# Altium PCB PCB_Advanced_H_Bridge.PcbDoc
Units mm, origin at the board's own origin, x right, y up, seen from the top; angles counter-clockwise.
Board outline 50 x 50 mm, 4 copper layers (Top Layer, Internal Plane 1, Internal Plane 2, Bottom Layer); 34 components, 30 nets, 166 pads, 90 vias.
Unrouted connection lines stored in the file: 1.
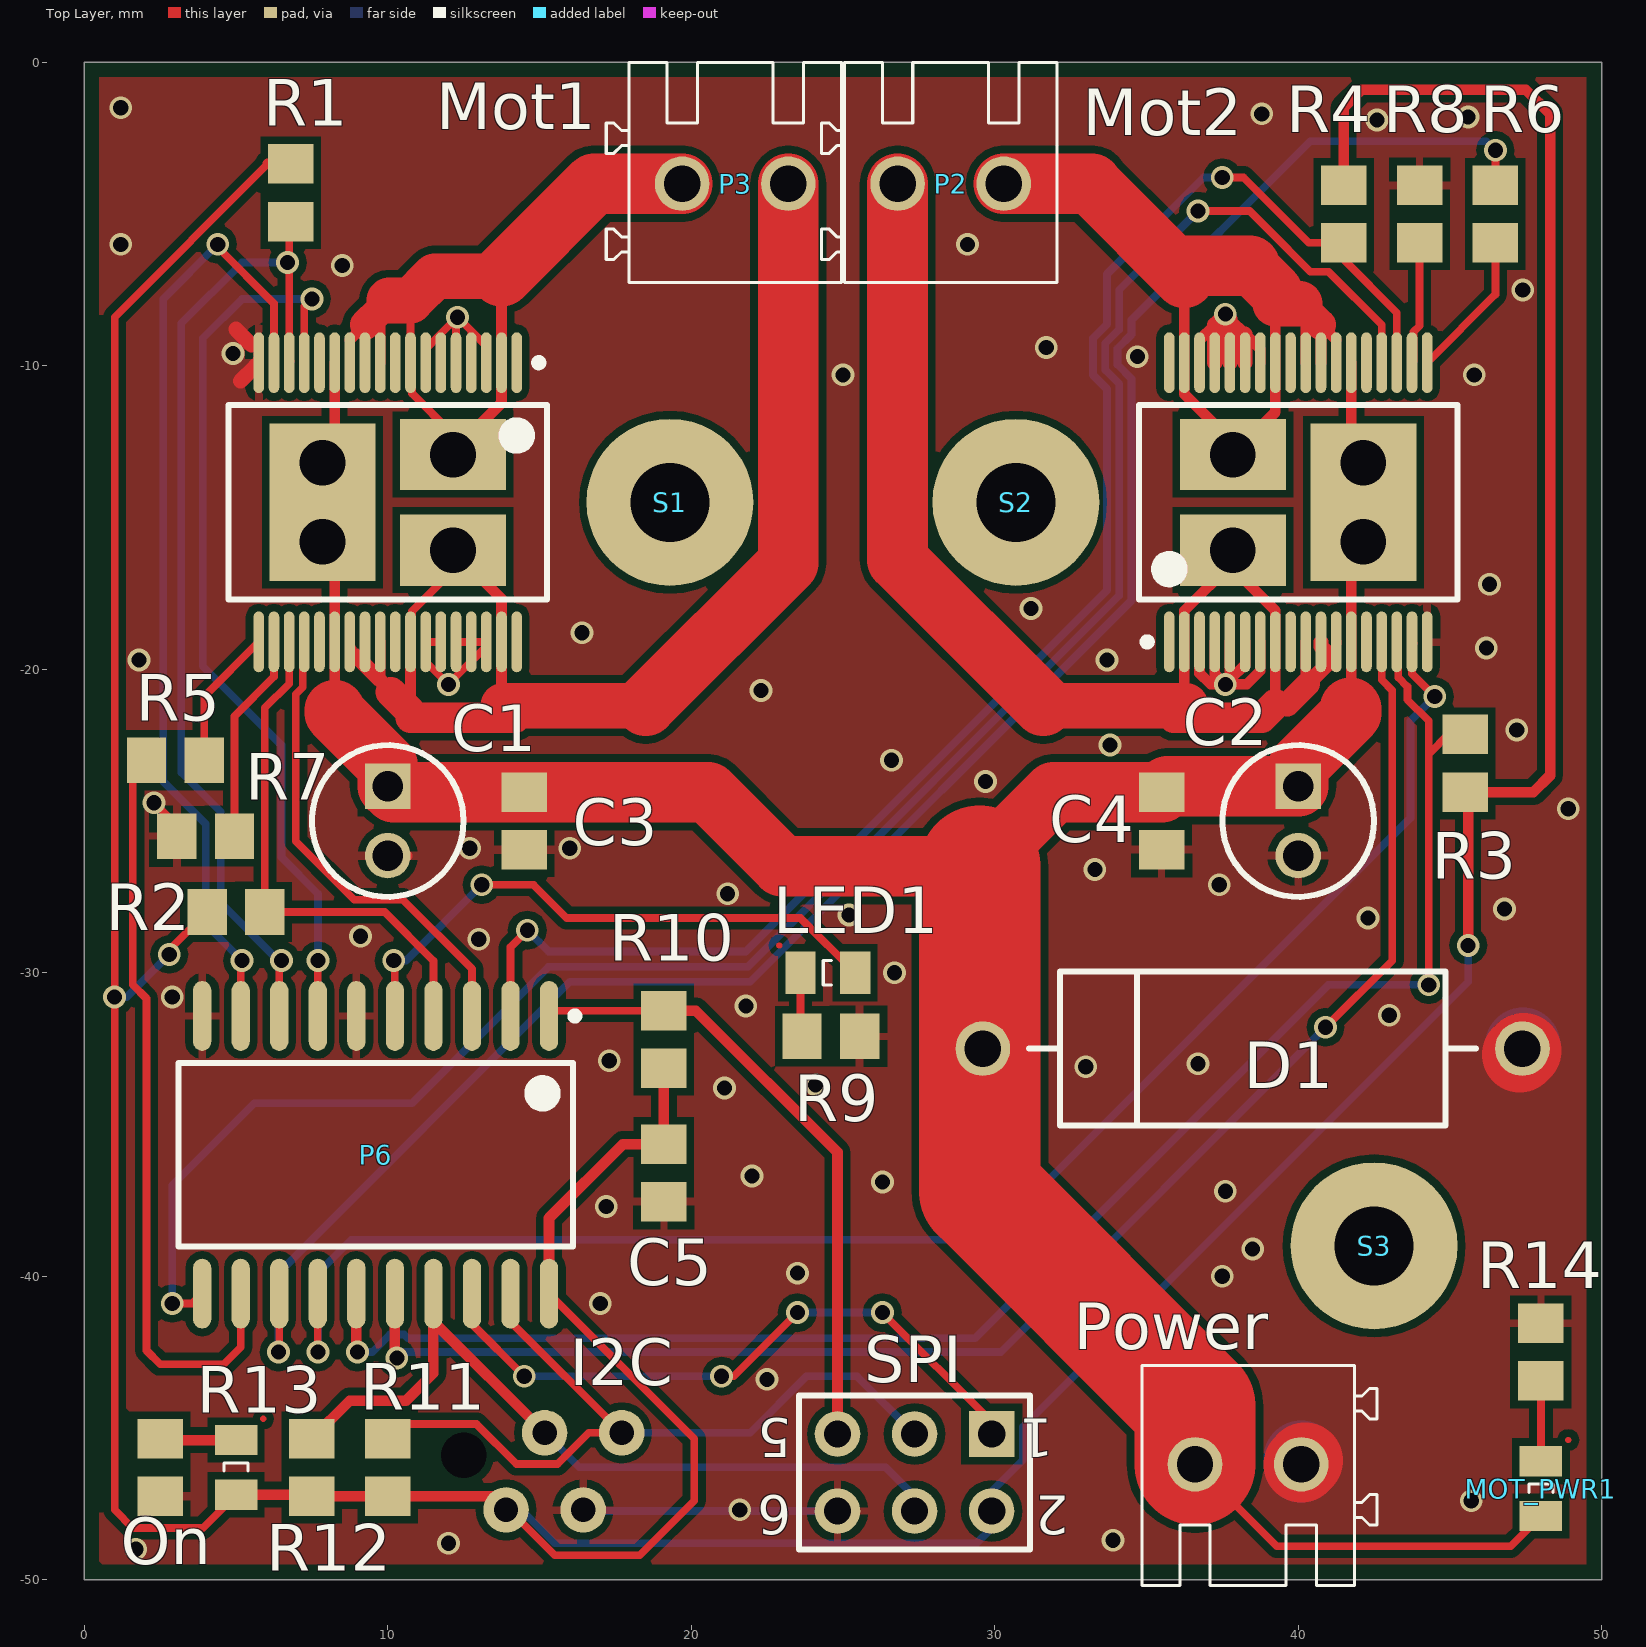
[diagram p0: Top Layer view]
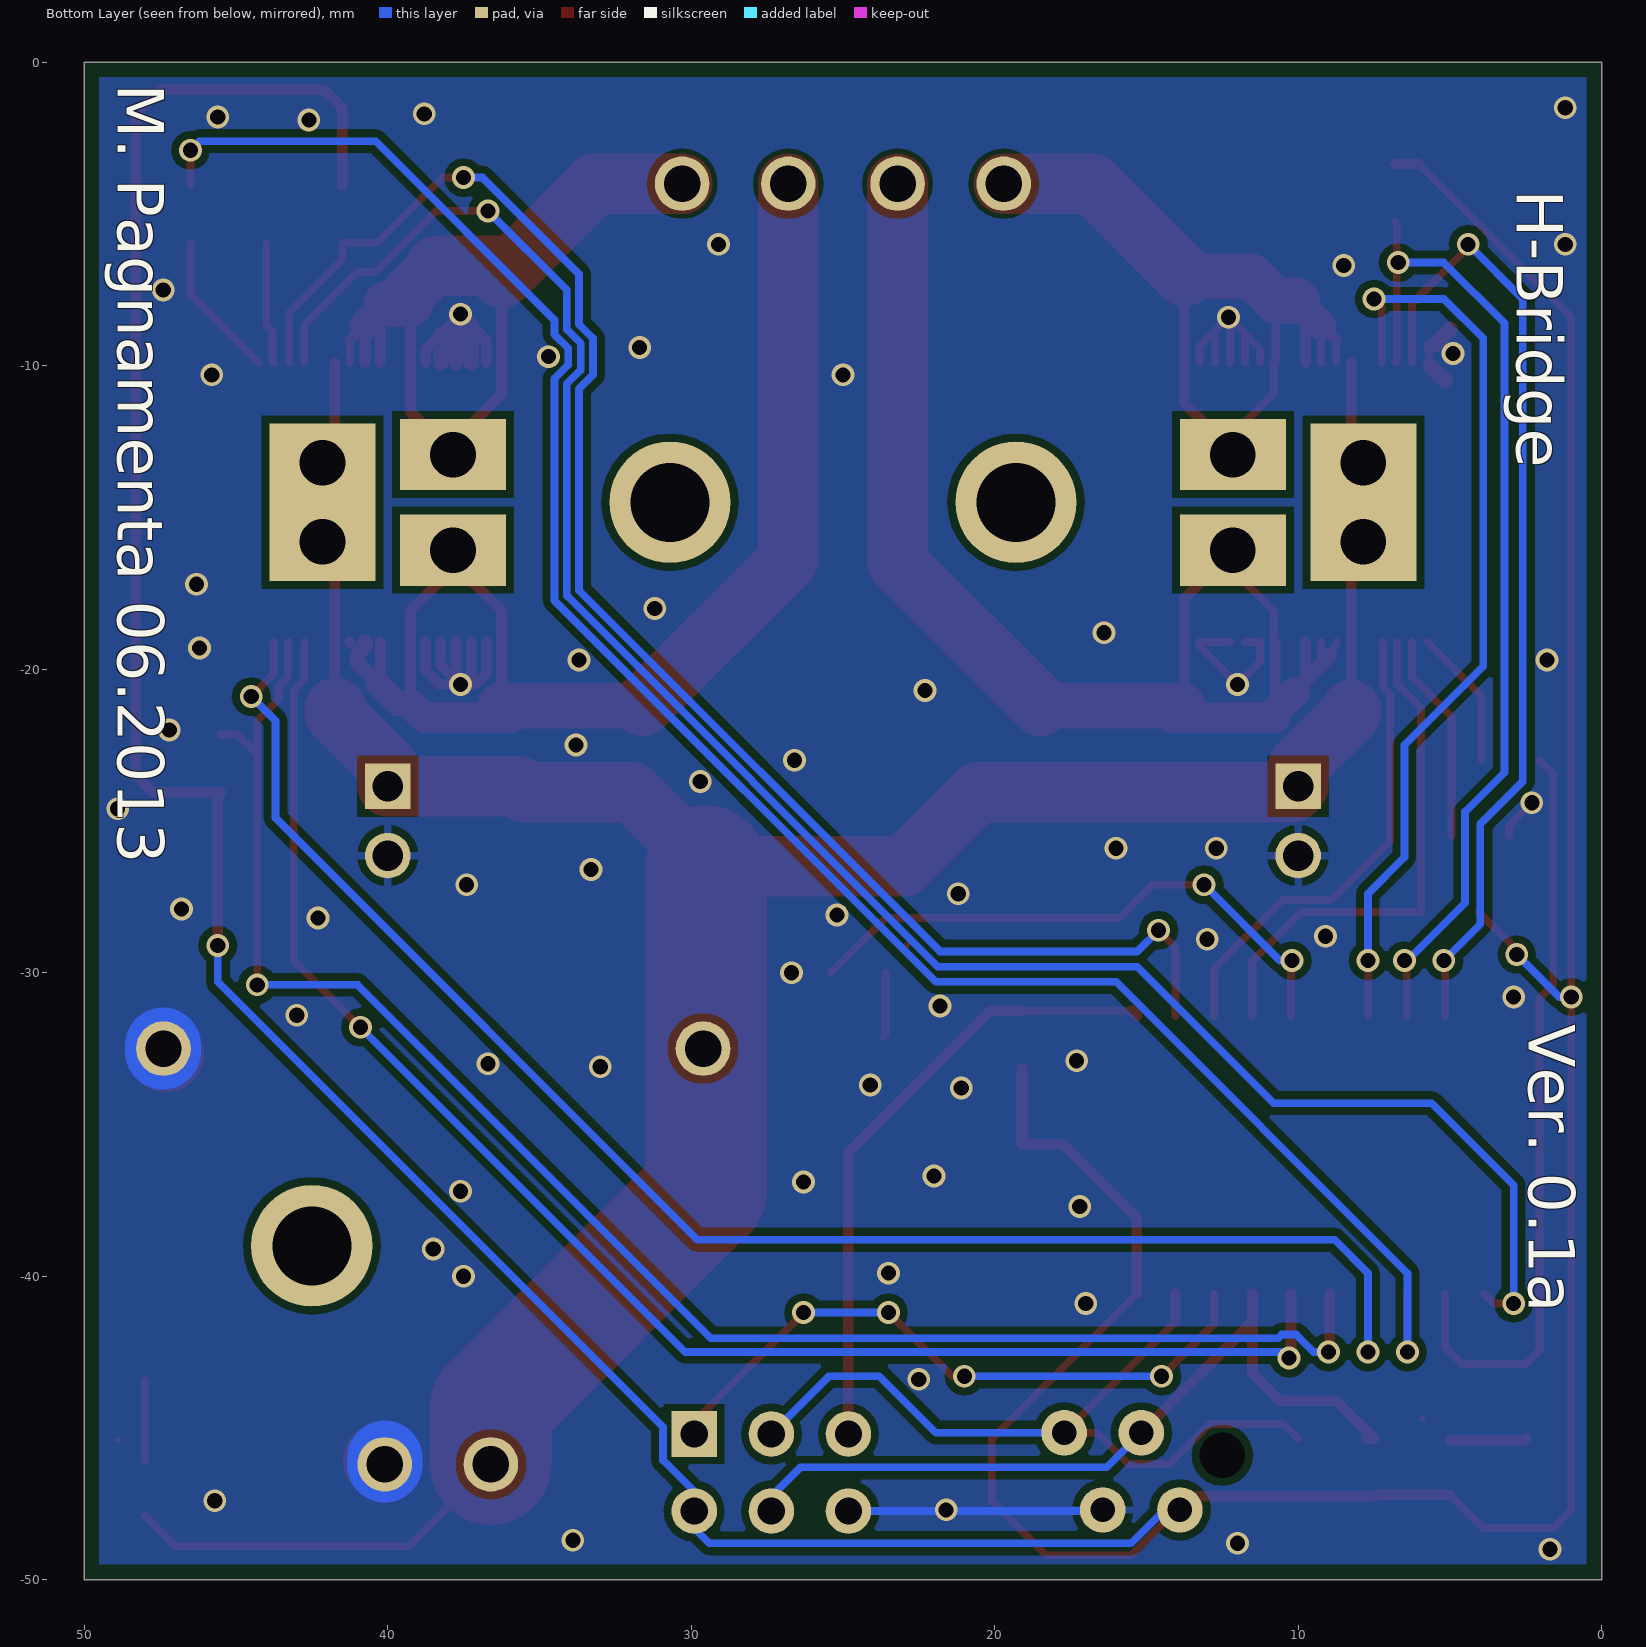
[diagram p1: Bottom Layer view, seen from below]
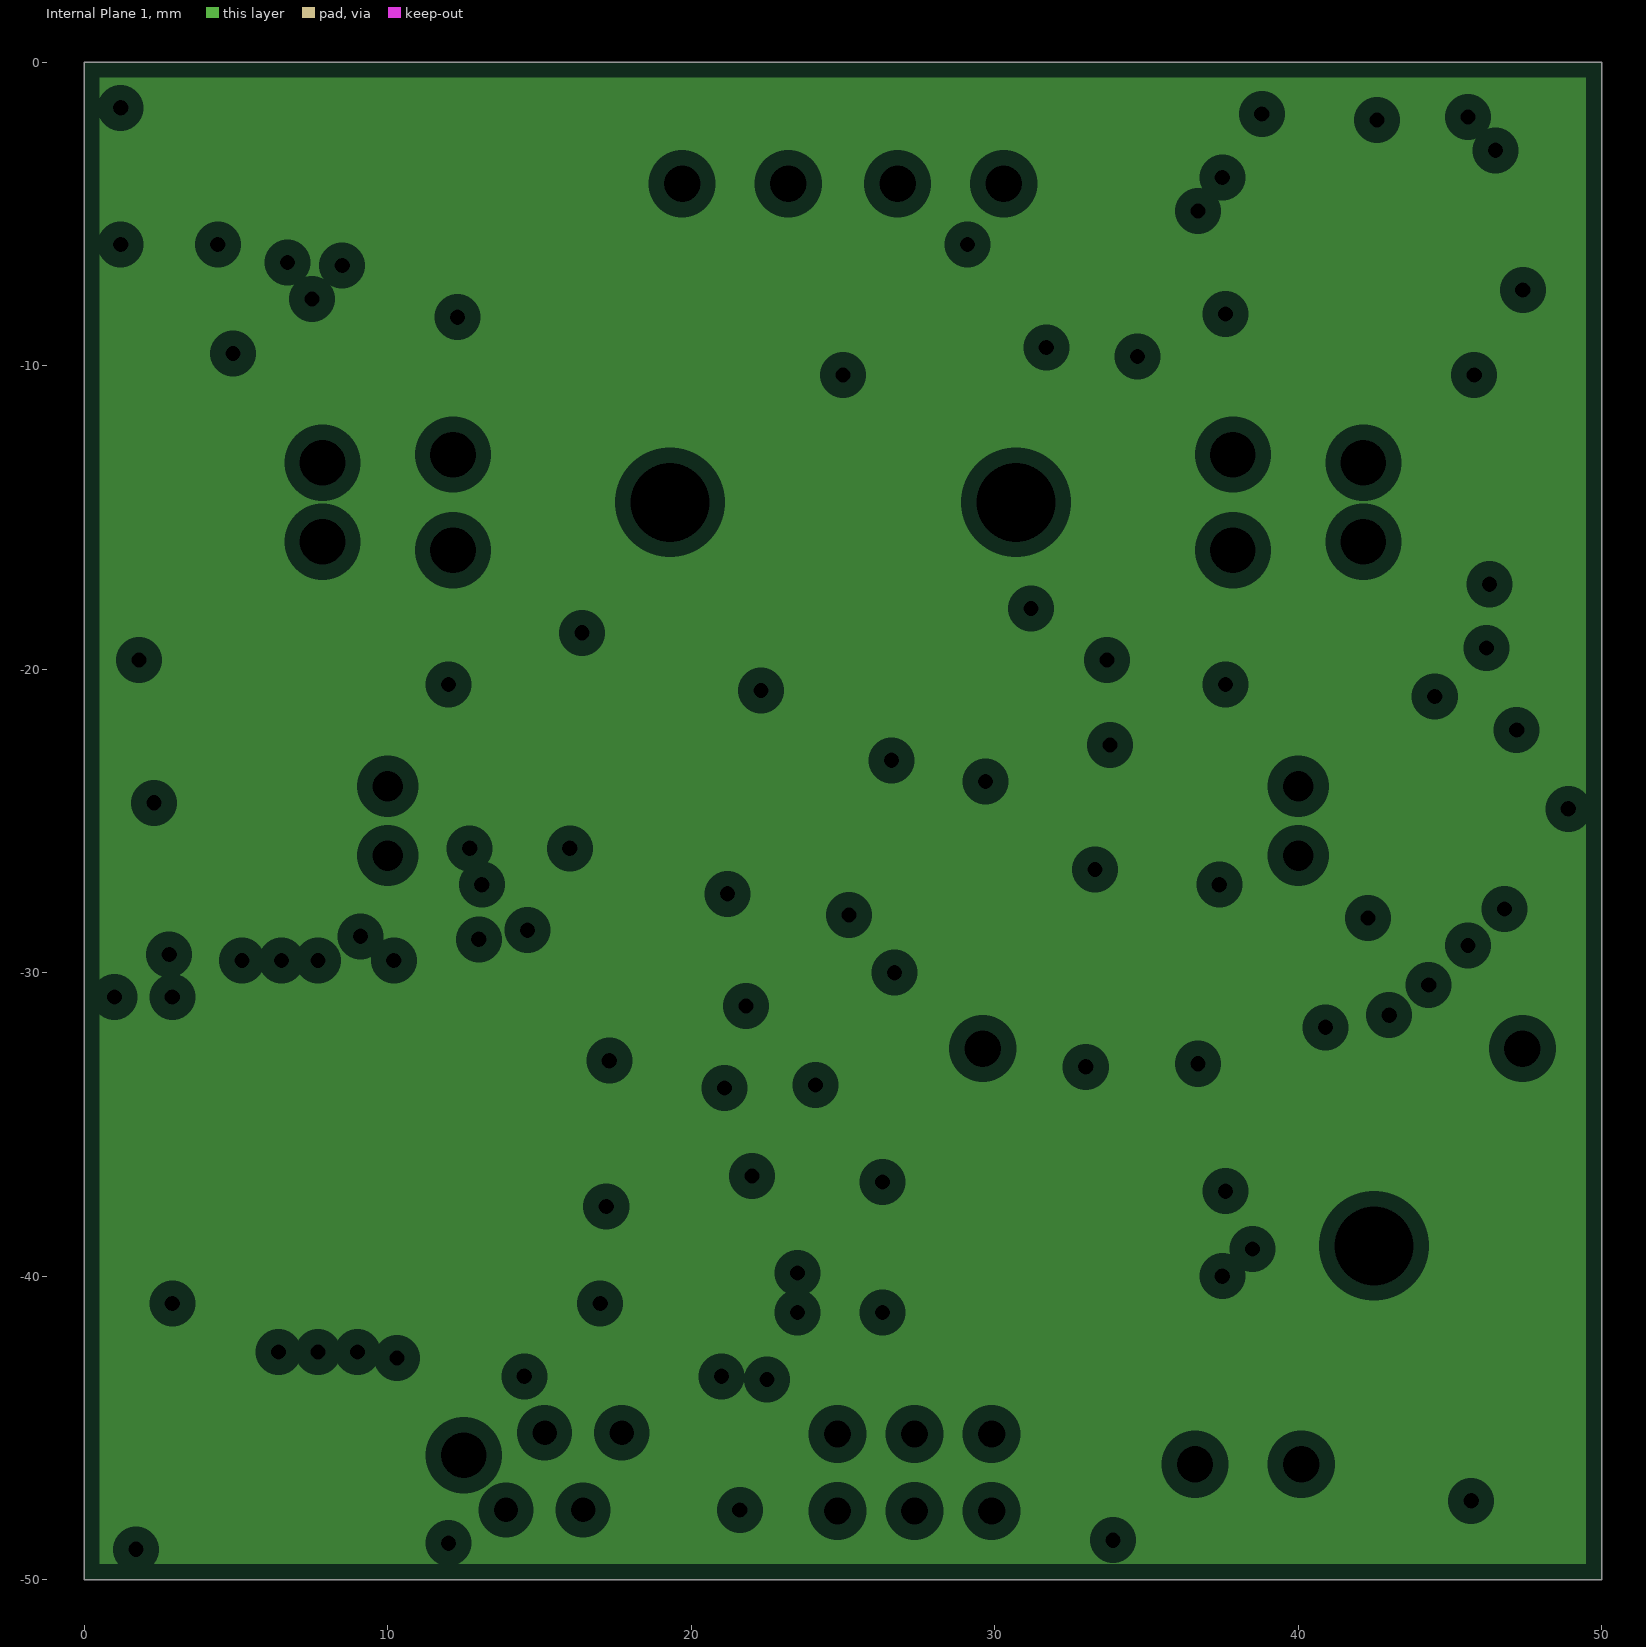
[diagram p2: Internal Plane 1, clearances drawn from the general rule]
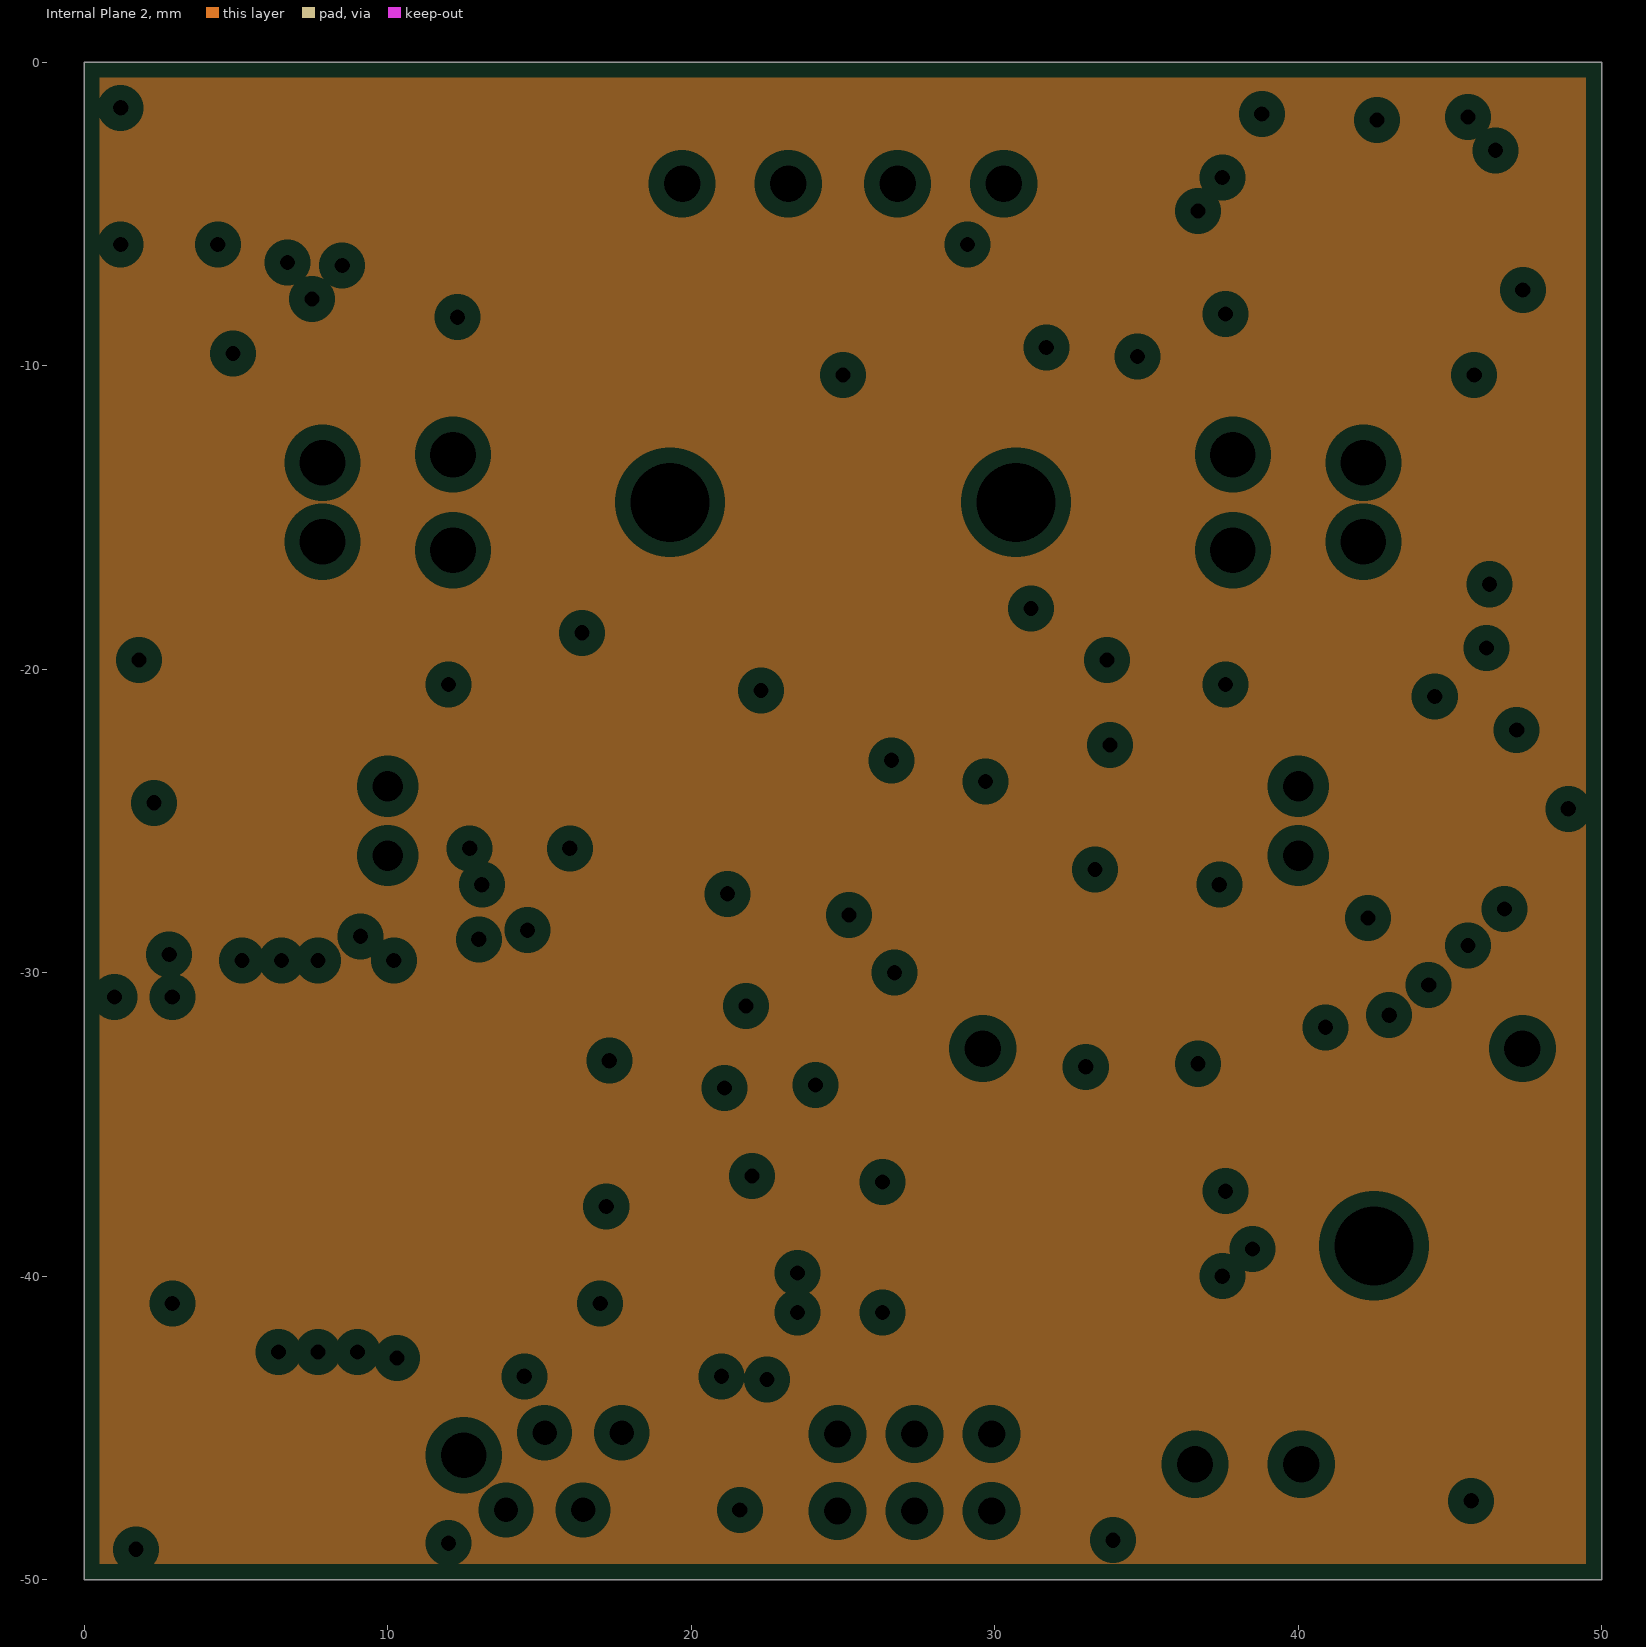
[diagram p3: Internal Plane 2, clearances drawn from the general rule]
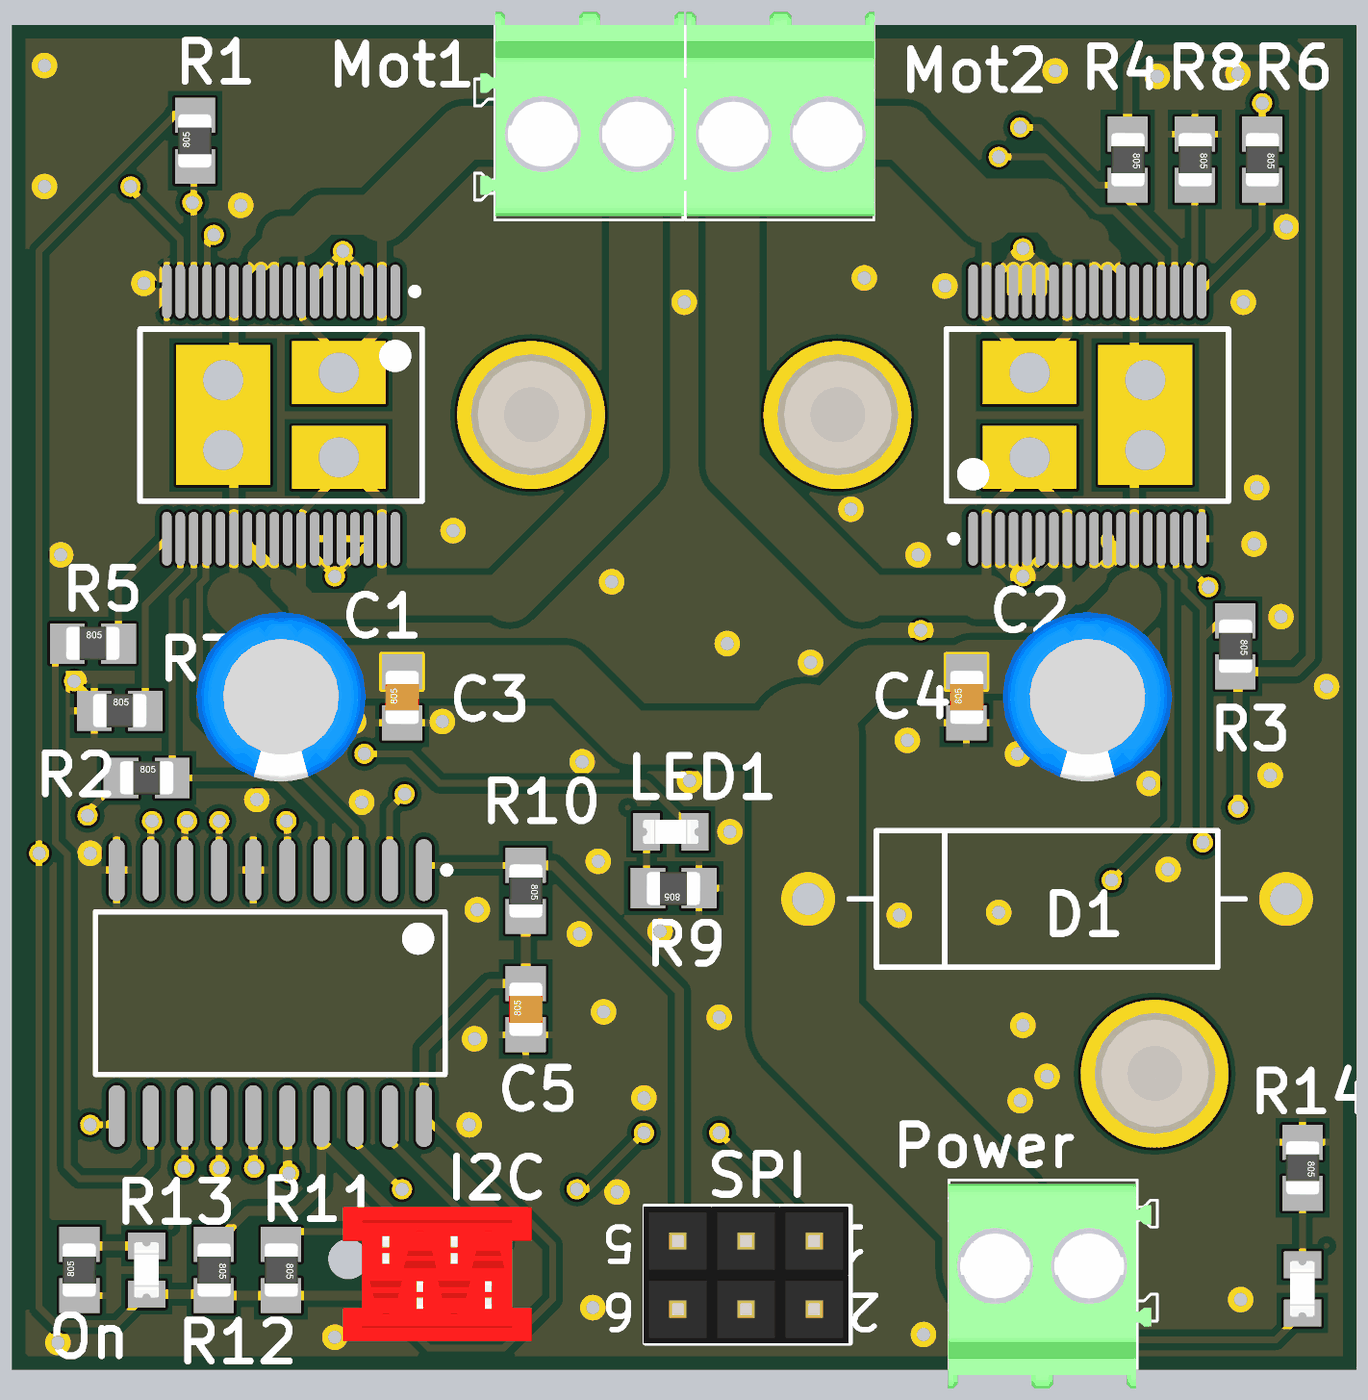
[diagram p4: 3D render of the assembled board from above, using the file's embedded part models]

## Layer stack, top to bottom
Top Layer: signal copper 0.0356
Dielectric: dielectric 0.32, FR-4, Dk 4.8
Internal Plane 1: plane copper 0.0356
Dielectric: dielectric 0.32, FR-4, Dk 4.8
Internal Plane 2: plane copper 0.0356
Dielectric: dielectric 0.32, FR-4, Dk 4.8
Bottom Layer: signal copper 0.0356

## Board outline
0,-50 50,-50 50,0 0,0

## Design rules (kind name [scope] priority, off if disabled: settings)
Clearance Clearance_Polygons [InPolygon] p1: gap=0.254
Clearance [All] p2: gap=0.15
HoleSize [All] p1: absolutevalues=TRUE maxlimit=6.2 minlimit=0.3 maxpercent=80.000 minpercent=20.000
MinimumSolderMaskSliver [All] p1 off: minsoldermaskwidth=0.15
PlaneClearance [All] p1: clearance=0.508
PlaneConnect [All] p1: planeconnectstyle=Relief reliefexpansion=0.508 reliefentries=4 reliefconductorwidth=0.254 reliefairgap=0.254
PolygonConnect PolygonConnect_via [All vs IsVia] p1: connectstyle=Direct reliefconductorwidth=0.254 reliefentries=4 polygonreliefangle="90 Angle"
PolygonConnect [All] p2: connectstyle=Relief reliefconductorwidth=0.254 reliefentries=4 polygonreliefangle="90 Angle"
RoutingVias [All] p1: holewidth=0.5 width=0.8 viastyle="Through Hole" minholewidth=0.35 minwidth=0.5 maxholewidth=1.5 maxwidth=2
SilkToSilkClearance [All] p1 off: silktosilkclearance=0.254
SilkscreenOverComponentPads [All] p1 off: minsilkscreentomaskgap=0.254
SolderMaskExpansion [All] p1: expansion=0.1
Width [All] p1: maxlimit=5 minlimit=0.2 preferedwidth=0.5
22 further rules are at their usual default settings.

## Components (designator, comment, footprint, x,y, rotation, side; value= is the part's Value field where it differs from the comment)
C1 "C Pol" C+/Rad-6x12mm 10,-25 r270 top
C2 "C Pol" C+/Rad-6x12mm 40,-25 r270 top
C3 "C" C/0805 14.5,-25 r90 top
C4 "C" C/0805 35.5,-25 r90 top
C5 "C" C/0805 19.1,-36.6 r90 top
D1 "Zener ~40V" DIODE-0.7 38.5,-32.5 r180 top
I2C "I2C" TYCO/215079-4 13.9,-47.7 r180 top (schematic designator I1)
LED1 "LED" LED-2012[0805] 24.5,-30 r0 top
Mot1 "H-Bridge1" VNH5180A-E 10,-14.5 r270 top (schematic designator P4)
Mot2 "H-Bridge2" VNH5180A-E 40,-14.5 r90 top (schematic designator P5)
MOT_PWR1 "LED" LED-2012[0805] 48,-47 r270 top
On "LED" LED-2012[0805] 5,-46.3 r270 top (schematic designator PWR1)
P2 "MOT2" "Phoenix PT 2-Pole" 26.8,-4 r0 top
P3 "MOT1" "Phoenix PT 2-Pole" 19.7,-4 r0 top
P6 "ATtiny2313" ATtiny2313_SOIC_20S_new 9.6,-36 r270 top
Power "Power In" "Phoenix PT 2-Pole" 40.1,-46.2 r180 top (schematic designator P1)
R1 "3.3kOhm" R/0805 6.8,-4.3 r90 top
R2 "3.3kOhm" R/0805 5,-28 r0 top
R3 "3.3kOhm" R/0805 45.5,-23.1 r270 top
R4 "3.3kOhm" R/0805 41.5,-5 r270 top
R5 "1.5kOhm" R/0805 3,-23 r0 top
R6 "1.5kOhm" R/0805 46.5,-5 r270 top
R7 "10kOhm" R/0805 4,-25.5 r0 top
R8 "10kOhm" R/0805 44,-5 r270 top
R9 "1kOhm" R/0805 24.6,-32.1 r180 top
R10 "10kOhm" R/0805 19.1,-32.2 r270 top
R11 "10kOhm" R/0805 10,-46.3 r270 top
R12 "10kOhm" R/0805 7.5,-46.3 r270 top
R13 "1kOhm" R/0805 2.5,-46.3 r90 top
R14 "10kOhm" R/0805 48,-42.5 r270 top
S1 "SCREW" HW/SCREW/M2_5 19.3,-14.5 r0 top
S2 "SCREW" HW/SCREW/M2_5 30.7,-14.5 r0 top
S3 "SCREW" HW/SCREW/M2_5 42.5,-39 r0 top
SPI "ISP" HEADER2X3 29.9,-45.2 r180 top (schematic designator SPI1)

## Footprints (in the part's own frame and the unit in brackets; to place one, negate y for a bottom-side part, rotate by r counter-clockwise, add the part's x,y. Pads: shape width x height; smd on the part's side, far side on the other; paste and mask are expansions set on the pad)
ATtiny2313_SOIC_20S_new [mm]
  oval 2.3x0.6 smd: 1(-4.575,5.715) 2(-4.575,4.445) 3(-4.575,3.175) 4(-4.575,1.905) 5(-4.575,0.635) 6(-4.575,-0.635) 7(-4.575,-1.905) 8(-4.575,-3.175) 9(-4.575,-4.445) 10(-4.575,-5.715) 11(4.575,-5.715) 12(4.575,-4.445) 13(4.575,-3.175) 14(4.575,-1.905) 15(4.575,-0.635) 16(4.575,0.635) 17(4.575,1.905) 18(4.575,3.175) 19(4.575,4.445) 20(4.575,5.715)
  silkscreen extent -4.7,-6.5 3.03,6.69, body extent -3.7,-6.5 3.7,6.5, height 2.65
C+/Rad-6x12mm [mm] "Capacitor, Electrolytic, Radial; Body 5 x 6.8 mm (Dia.xH typ); Pin Spacing 2 mm (typ)"
  rect 1.5x1.5 hole 1: 1(-1.143,0)
  round 1.5 hole 1: 2(1.143,0)
  silkscreen extent -2.5,-2.5 2.5,2.5, body extent -3.18,-3.15 3.13,3.15, height 10.98
C/0805 [mm] "Chip Resistor; Body 2.0 x 1.3 mm (LxW typ)"
  rect 1.3x1.5 smd: 1(-0.95,0) 2(0.95,0)
  body extent -1,-0.64 1,0.62, height 0.78
DIODE-0.7 [mm] "Diode, Thru-Hole; 2 Leads; 0.7 in Pin Spacing"
  round 1.8 hole 1.2: 1(-8.89,0) 2(8.89,0)
  silkscreen extent -7.37,-2.54 7.37,2.54
HEADER2X3 [mm] "Connector; Header; 3x2 Position"
  rect 1.5x1.5 hole 0.9: 1(0,0)
  round 1.5 hole 0.9: 2(0,2.54) 3(2.54,0) 4(2.54,2.54) 5(5.08,0) 6(5.08,2.54)
  silkscreen extent -1.27,-1.27 6.35,3.81, body extent -1.21,-1.25 6.41,3.83, height 8.44
HW/SCREW/M2_5 [mm]
  round 5.5 / inner round 4 / far side round 4 hole 2.6: 1(0,0)
  body extent -2.24,-2.24 2.26,2.26, height 2.5
LED-2012[0805] [mm] "SMD LED - 0805 package"
  rect 1x1.4 smd: A(0.9,0) K(-0.9,0)
  Top Layer lines w0.203: -1.6,0.9 -1.6,0.9
  silkscreen extent -0.15,-0.4 0.13,0.4, body extent -1.03,-0.46 1.03,0.45, height 0.84
"Phoenix PT 2-Pole" [mm] "PT 1,5/ 2-3,5-H - Ref 1984617"
  round 1.8 hole 1.2: 1(0,0) 2(3.5,0)
  silkscreen extent -2.5,-3.25 5.25,4, body extent -2.28,-3.1 5.29,4.5, height 9
R/0805 [mm] "Chip Resistor; Body 2.0 x 1.3 mm (LxW typ)"
  rect 1.3x1.5 smd: 1(-0.95,0) 2(0.95,0)
  body extent -1,-0.62 1,0.64, height 0.78
TYCO/215079-4 [mm]
  round 1.5 hole 0.8: 1(0,0) 2(-1.27,-2.54) 3(-2.54,0) 4(-3.81,-2.54)
  round 1.3 hole 1.5 unplated: 5(1.4,-1.8)
  body extent -5.41,-3.74 1.6,1.26, height 4
VNH5180A-E [mm] "SSOP, 36-Leads, Body 10.5x7.6mm (max), Pitch 0.50mm, IPC Medium Density"
  oval 2x0.35 smd: 1(-4.6,4.25) 2(-4.6,3.75) 3(-4.6,3.25) 4(-4.6,2.75) 5(-4.6,2.25) 6(-4.6,1.75) 7(-4.6,1.25) 8(-4.6,0.75) 9(-4.6,0.25) 10(-4.6,-0.25) 11(-4.6,-0.75) 12(-4.6,-1.25) 13(-4.6,-1.75) 14(-4.6,-2.25) 15(-4.6,-2.75) 16(-4.6,-3.25) 17(-4.6,-3.75) 18(-4.6,-4.25) 19(4.6,-4.25) 20(4.6,-3.75) 21(4.6,-3.25) 22(4.6,-2.75) 23(4.6,-2.25) 24(4.6,-1.75) 25(4.6,-1.25) 26(4.6,-0.75) 27(4.6,-0.25) 28(4.6,0.25) 29(4.6,0.75) 30(4.6,1.25) 31(4.6,1.75) 32(4.6,2.25) 33(4.6,2.75) 34(4.6,3.25) 35(4.6,3.75) 36(4.6,4.25)
  rect 2.35x3.5 hole 1.5: 37(-1.575,2.15) 38(1.575,2.15)
  rect 2.6x3.5 hole 1.5: 39(-1.3,-2.15) 39(1.3,-2.15)
  silkscreen extent -4.72,-5.25 3.2,5.25, body extent -3.8,-5.25 3.8,5.25, height 2.47

## Part data
C1 C2: library part C+/Rad, "Polarized Capacitor (Radial)"
C3 C4 C5: "Capacitor"
D1: library part "D Zener", "Zener Diode"
I2C: library part Micromatch-I2C, "Micromatch I2C Connector"
Mot1 Mot2: library part VNH5180A-E, "Header, 2-Pin"
P2 P3 Power: library part "Screw Block 2", "2-Pin Screw Terminal"
P6: library part ATtiny2313_SOIC_20S, "Header, 2-Pin"
R1 R2 R3 R4 R5 R6 R7 R8 R9 R10 R11 R12 R13 R14: library part R, "Resistor"
SPI: library part "AVR ISP 6pin", "AVR ISP 6pin"

## Via types
v1: diameter 0.75, hole 0.5, Top Layer to Bottom Layer, 90 vias

## Nets (pads, with @x,y where several pads share a name; then routed paths per layer and width w, separated by ;. In a path a pad name is that pad's centre, name@x,y a point inside that pad or via, vN(x,y) a via of type N, cw(c..) or ccw(c..) an arc to the next point about the centre after c; other vN are vias at no path point)
ANTICLKWISE1: Mot1.22 P6.3 | length 15.8
  Top Layer w0.254: Mot1.22 7.202,-19.148 7.202,-20.592 6.973,-20.821 6.973,-25.673 8.896,-27.596 10.496,-27.596 12.775,-29.875 P6.3
ANTICLKWISE2: Mot2.22 P6.11 | length 67.3
  Top Layer w0.254: v1(2.9,-40.9) 3.56,-40.9 P6.11 ; v1(36.7,-4.9) 38.406,-4.9 39.677,-6.171 39.677,-6.177 40.4,-6.9 41,-6.9 42.75,-8.65 Mot2.22
  Bottom Layer w0.254: v1(2.9,-40.9) 2.9,-37 5.6,-34.3 10.8,-34.3 15.3,-29.8 21.871,-29.8 34.104,-17.567 34.104,-10.597 33.644,-10.137 33.644,-9.263 34.104,-8.803 34.104,-7.496 v1(36.7,-4.9)
CLKWISE1: Mot1.15 P6.7 | length 30.2
  Top Layer w0.254: Mot1.15 7.25,-8.05 v1(7.5,-7.8) ; P6.7 7.695,-29.605 v1(7.7,-29.6)
  Bottom Layer w0.254: v1(7.5,-7.8) 5.2,-7.8 3.9,-9.1 3.9,-19.9 6.5,-22.5 6.5,-26.2 7.7,-27.4 v1(7.7,-29.6)
CLKWISE2: Mot2.15 P6.16 | length 51
  Top Layer w0.254: v1(40.9,-31.8) 43.1,-29.6 43.1,-20.7 42.75,-20.35 Mot2.15
  Top Layer w0.35: P6.16 10.235,-42.435 10.3,-42.5 v1(10.3,-42.7)
  Bottom Layer w0.254: v1(10.3,-42.7) 10.5,-42.5 30.2,-42.5 v1(40.9,-31.8)
CS1: Mot1.19 R5.2 | length 4.6
  Top Layer w0.254: R5.2 3.95,-20.9 Mot1.19
CS2: Mot2.19 R6.2 | length 4.9
  Top Layer w0.254: Mot2.19 46.5,-7.65 R6.2
CURRENT1: P6.12 R5.1 | length 25.1
  Top Layer w0.254: R5.1 1.6,-23.45 1.6,-30.4 2.05,-30.85 2.05,-42.45 2.5,-42.9 4.6,-42.9 5.155,-42.345 P6.12
CURRENT2: P6.13 R6.1 | length 67.2
  Top Layer w0.254: v1(6.4,-42.5) 6.425,-42.475 P6.13 ; R6.1 v1(46.5,-2.9)
  Bottom Layer w0.254: v1(6.4,-42.5) 6.4,-39.9 16,-30.3 21.943,-30.3 34.508,-17.735 34.508,-10.43 34.048,-9.97 34.048,-9.43 34.508,-8.97 34.508,-8.492 40.4,-2.6 46.2,-2.6 v1(46.5,-2.9)
ERRA1: Mot1.16 P6.8 R1.1 | length 33.3
  Top Layer w0.254: P6.8 6.425,-29.675 v1(6.5,-29.6) ; Mot1.16@6.798,-9.852 Mot1.16 6.75,-5.3 R1.1
  Bottom Layer w0.254: v1(6.5,-29.6) 6.4,-29.6 4.5,-27.7 4.5,-24.7 3.2,-23.4 3.2,-8.6 5.2,-6.6 v1(6.7,-6.6)
ERRA2: Mot2.16 P6.15 R3.1 | length 55.6
  Top Layer w0.254: Mot2.16 43.298,-19.148 43.298,-20.269 43.6,-20.571 43.6,-21 44.3,-21.7 44.3,-22.8 ; v1(44.3,-30.4) 44.3,-22.8 ; R3.1 44.95,-22.15 44.3,-22.8
  Top Layer w0.35: P6.15 8.965,-42.465 v1(9,-42.5)
  Bottom Layer w0.254: v1(9,-42.5) 9.487,-42.5 10.062,-41.925 10.538,-41.925 10.661,-42.048 29.352,-42.048 41,-30.4 v1(44.3,-30.4)
ERRB1: Mot1.21 P6.4 R2.2 | length 17.3
  Top Layer w0.254: Mot1.21 6.75,-20.473 5.95,-21.273 R2.2 9.9,-28 11.505,-29.605 P6.4
ERRB2: Mot2.21 P6.2 R4.2 | length 52.9
  Top Layer w0.254: P6.2 14.045,-29.155 v1(14.6,-28.6) ; v1(37.5,-3.8) 38.2,-3.8 40.35,-5.95 R4.2 41.5,-6.5 43.25,-8.25 Mot2.21
  Bottom Layer w0.254: v1(14.6,-28.6) 15.3,-29.3 21.8,-29.3 33.7,-17.4 33.7,-10.765 33.24,-10.305 33.24,-9.095 33.7,-8.635 33.7,-6.978 36.878,-3.8 v1(37.5,-3.8)
GND: C1.2 C2.2 C3.1 C4.1 C5.1 D1.1 I2C.3 Mot1.3 Mot1.4 Mot1.5 Mot1.6 Mot1.7 Mot1.18 Mot1.30 Mot1.31 Mot1.32 Mot1.33 Mot1.34 Mot2.3 Mot2.4 Mot2.5 Mot2.6 Mot2.7 Mot2.18 Mot2.30 Mot2.31 Mot2.32 Mot2.33 Mot2.34 P6.6 P6.10 Power.1 R7.1 R8.1 R9.1 R13.1 R14.1 SPI.6 | length 42.4
  Top Layer w0.254: v1(2.3,-24.4) 3.05,-25.15 R7.1 ; 5.512,-9.312 5.75,-9.312 5.666,-9.888 Mot1.18@5.65,-10 ; Mot1.7 11.25,-9.45 Mot1.6@11.75,-8.95 ; Mot1.31 Mot1.30 11.25,-19.75 v1(12,-20.5) 13.25,-19.25 Mot1.34 Mot1.33 Mot1.32 ; Mot1.6 Mot1.6@11.75,-8.95 ; Mot1.5 v1@12.25,-8.45 ; Mot1.4 12.75,-8.85 ; Mot1.3 13.25,-9.35 12.75,-8.85 ; Mot1.6@11.75,-8.95 v1@12.25,-8.45 ; v1@12.25,-8.45 v1(12.3,-8.4) 12.75,-8.85
  Top Layer w0.35: C1.2 C1.2@10.643,-26.143 ; Mot2.3 36.75,-20.13 37.12,-20.5 v1(37.6,-20.5) ; Mot2.34 36.75,-9.15 37.25,-8.65 ; Mot2.4 37.25,-20.15 v1(37.6,-20.5) ; v1(37.6,-8.3) 37.75,-8.45 38.25,-8.95 38.75,-9.45 Mot2.30 ; Mot2.5 v1@37.75,-20.35 ; Mot2.6 38.25,-19.85 v1@37.75,-20.35 ; Mot2.7 38.75,-20.05 38.3,-20.5 v1(37.6,-20.5) ; v1(37.6,-20.5) v1@37.75,-20.35
  Top Layer w0.5: 5,-8.8 5.512,-9.312 ; 5.15,-10.5 Mot1.18@5.65,-10 ; Mot2.33 37.25,-8.65 v1(37.6,-8.3) ; Mot2.32 v1@37.75,-8.45 ; Mot2.31 Mot2.31@38.25,-8.95
  Top Layer w2.5: Power.1 Power.1@40.227,-46.073 ; D1.1@47.3,-32.7 D1.1@47.427,-32.573
  Bottom Layer w0.254: I2C.3 16.48,-47.74 SPI.6
  Bottom Layer w2.5: Power.1 Power.1@40.1,-46 ; D1.1@47.4,-32.6 D1.1@47.4,-32.4
  other v1: 1.7,-49 12,-48.8 33.9,-48.7 21.6,-47.7 45.7,-47.4 22.5,-43.4 17,-40.9 37.5,-40 23.5,-39.9 38.5,-39.1 17.2,-37.7 37.6,-37.2 26.3,-36.9 22,-36.7 21.1,-33.8 24.1,-33.7 33,-33.1 36.7,-33 17.3,-32.9 43,-31.4 21.8,-31.1 2.9,-30.8 26.7,-30 13,-28.9 9.1,-28.8 42.3,-28.2 25.2,-28.1 46.8,-27.9 21.2,-27.4 37.4,-27.1 33.3,-26.6 12.7,-25.9 16,-25.9 48.9,-24.6 29.7,-23.7 26.6,-23 33.8,-22.5 47.2,-22 22.3,-20.7 1.8,-19.7 33.7,-19.7 46.2,-19.3 16.4,-18.8 31.2,-18 46.3,-17.2 25,-10.3 45.8,-10.3 34.7,-9.7 4.9,-9.6 31.7,-9.4 47.4,-7.5 8.5,-6.7 1.2,-6 29.1,-6 42.6,-1.9 45.6,-1.8 38.8,-1.7 1.2,-1.5
LED1: LED1.A P6.5 | length 19.3
  Top Layer w0.254: v1(10.2,-29.6) 10.235,-29.635 P6.5 ; v1(13.1,-27.1) 14.8,-27.1 15.9,-28.2 23.6,-28.2 LED1.A
  Bottom Layer w0.254: v1(10.2,-29.6) 10.6,-29.6 v1(13.1,-27.1)
MISO: P6.18 SPI.1 | length 21.6
  Top Layer w0.254: P6.18 12.775,-41.575 v1(14.5,-43.3) ; v1(21,-43.3) 21.4,-43.3 v1(23.5,-41.2) ; v1(26.3,-41.2) 29.9,-44.8 SPI.1
  Bottom Layer w0.254: v1(14.5,-43.3) v1(21,-43.3) ; v1(23.5,-41.2) v1(26.3,-41.2)
MOSI: I2C.2 P6.17 R12.1 SPI.4 | length 26.5
  Top Layer w0.35: R12.1@7.75,-45.35 R12.1 8.75,-44.1 10.6,-44.1 11.505,-43.195 P6.17@11.505,-41.495 ; P6.17 P6.17@11.505,-41.495 ; I2C.2 P6.17@11.505,-41.495
  Bottom Layer w0.254: I2C.2 16.31,-46.3 26.4,-46.3 SPI.4@27.36,-47.26
  Bottom Layer w0.35: SPI.4 SPI.4@27.36,-47.26
NetLED1_K: LED1.K R9.2 | length 2.1
  Top Layer w0.254: LED1.K 23.6,-32.05 R9.2
NetMOT_PWR1_K: MOT_PWR1.K R14.2 | length 2.6
  Top Layer w0.254: MOT_PWR1.K R14.2
NetP4_20: Mot1.20 R7.2 | length 6.9
  Top Layer w0.254: R7.2 4.95,-21.55 6.25,-20.25 Mot1.20
NetP5_20: Mot2.20 R8.2 | length 4.1
  Top Layer w0.254: Mot2.20 43.798,-9.852 43.798,-8.888 44,-8.686 R8.2
NetPWR1_K: On.K R13.2 | length 2.5
  Top Layer w0.35: R13.2 2.55,-45.4 On.K
OUT1A: Mot1.2 Mot1.8 Mot1.10 Mot1.11 Mot1.12 Mot1.37 P3.1 | length 28.9
  Top Layer w0.254: Mot1.12 Mot1.12@8.75,-9.15 ; Mot1.11 9.25,-8.65 ; 9.75,-8.15 10.05,-7.85 ; 10.75,-7.85 Mot1.8 10.798,-9.948 10.798,-10.912 12.15,-12.264 Mot1.37@12.15,-12.825
  Top Layer w0.35: Mot1.12@8.75,-9.15 9.25,-8.65 ; Mot1.10 9.75,-8.15 ; Mot1.37 12.15,-12.825 13.75,-11.225 Mot1.2 13.75,-7.05
  Top Layer w1: 9.25,-8.65 9.75,-8.15
  Top Layer w1.5: 10.05,-7.85 10.75,-7.85 11.55,-7.05 13.75,-7.05
  Top Layer w2: 13.75,-7.05 16.8,-4 P3.1
OUT1B: C1.1 C2.1 C3.2 C4.2 D1.2 Mot1.13 Mot1.24 Mot1.25 Mot1.26 Mot1.27 Mot1.29 Mot1.35 Mot1.38 Mot1.39 Mot2.13 Mot2.24 Mot2.39 MOT_PWR1.A P3.2 Power.2 | length 137.5
  Top Layer w0.254: Mot1.25 8.75,-19.15 8.839,-19.318 8.975,-19.575 ; Mot1.26@9.25,-19.564 Mot1.26 ; 9.75,-20.35 9.862,-20.462 ; Mot1.27 Mot1.27@9.798,-19.148 ; Mot1.29@10.798,-19.148 Mot1.29 10.798,-19.052 10.798,-18.088 12.15,-16.736 Mot1.38 ; Mot1.35 Mot1.35@13.798,-19.148 ; 13.8,-21.2 14.2,-21.6 ; C4.2 C4.2@35.693,-23.857 ; Power.2 39.3,-48.9 47,-48.9 MOT_PWR1.A ; Mot2.13@41.702,-19.148 Mot2.13
  Top Layer w0.35: Mot1.39@7.85,-15.8 8.25,-16.2 Mot1.24 8.25,-21.35 ; Mot1.39@7.85,-13.2 8.25,-12.8 Mot1.13 ; 9.75,-20.35 Mot1.27 ; 10.75,-21.4 Mot1.29 ; Mot1.38 13.75,-17.675 Mot1.35 13.75,-21.55 13.8,-21.6 ; 41.721,-21.271 41.75,-21.242 Mot2.13 41.75,-16.2 Mot2.39@42.15,-15.8 ; Mot2.24 41.75,-12.8 Mot2.39@42.15,-13.2
  Top Layer w0.5: 8.975,-19.575 9.75,-20.35
  Top Layer w1: 10.1,-20.75 10.75,-21.4 10.75,-21.6 13.8,-21.6 14.2,-21.6
  Top Layer w1.5: 13.8,-21.2 18.5,-21.2
  Top Layer w2: 8.25,-21.35 8.25,-21.433 10,-23.183 C1.1 10.193,-24.05 C3.2 20.55,-24.05 22.99,-26.49 29.51,-26.49 31.95,-24.05 C4.2 ; 18.5,-21.2 23.2,-16.5 P3.2 ; C4.2@35.693,-23.857 C2.1 40,-23.2 41.75,-21.45 41.75,-21.3 41.721,-21.271
  Top Layer w4: 29.51,-26.49 29.51,-37.2 36.6,-44.29 Power.2
OUT2A: Mot2.2 Mot2.8 Mot2.10 Mot2.11 Mot2.12 Mot2.37 P2.1 | length 44
  Top Layer w0.254: Mot2.10@40.202,-19.148 Mot2.10 ; 40.25,-20.4 40.325,-20.475
  Top Layer w0.35: 35.9,-21.6 36.3,-21.2 ; 36.25,-21.15 Mot2.2 36.25,-18.068 Mot2.37@37.85,-16.468 ; Mot2.37 Mot2.37@37.85,-16.468 ; 40.25,-20.4 Mot2.10 ; Mot2.12@41.25,-19.15 Mot2.12 ; Mot2.37@37.85,-16.468 37.85,-16.668 39.25,-18.068 Mot2.8 39.25,-21.15 ; 39.25,-21.15 39.65,-21.15 39.25,-21.15
  Top Layer w0.5: 40.325,-20.475 41,-19.8 41,-19.5 40.75,-19.25 Mot2.11
  Top Layer w0.8: 39.65,-21.15 40.325,-20.475
  Top Layer w1: 35.9,-21.6 38.8,-21.6 39.25,-21.15
  Top Layer w1.5: 31.6,-21.2 36.3,-21.2
  Top Layer w2: P2.1 26.8,-16.4 31.6,-21.2
OUT2B: Mot2.25 Mot2.26 Mot2.27 Mot2.29 Mot2.35 Mot2.38 P2.2 | length 29.7
  Top Layer w0.254: 33.2,-4.05 33.2,-4 ; 40.05,-7.95 40.25,-8.15 ; Mot2.25 Mot2.25@41.25,-9.15
  Top Layer w0.35: 36.25,-6.7 36.25,-7.1 Mot2.35 36.25,-10.932 37.85,-12.532 Mot2.38 39.25,-11.525 Mot2.29 39.25,-7.95 39.25,-7.55 ; Mot2.27 40.25,-8.15 ; Mot2.26 40.75,-8.65 Mot2.25@41.25,-9.15
  Top Layer w1: 40.25,-8.15 40.75,-8.65
  Top Layer w1.5: 39.25,-7.95 40.05,-7.95
  Top Layer w1.8: 38.4,-6.7 39.25,-7.55
  Top Layer w2: P2.2 33.2,-4 ; 33.2,-4.05 36.25,-7.1 ; 36.25,-6.7 38.4,-6.7
PWM1: Mot1.17 P6.9 | length 31.9
  Top Layer w0.254: v1(4.4,-6) 4.4,-6.1 6.25,-7.95 Mot1.17 ; P6.9 5.155,-29.645 v1(5.2,-29.6)
  Bottom Layer w0.254: v1(4.4,-6) 2.6,-7.8 2.6,-23.7 4,-25.1 4,-28.4 v1(5.2,-29.6)
PWM2: Mot2.17 P6.14 | length 53.7
  Top Layer w0.254: P6.14 7.695,-42.495 v1(7.7,-42.5) ; Mot2.17@43.798,-19.148 Mot2.17 43.75,-20.15 v1(44.5,-20.9) v1@44.3,-20.9
  Bottom Layer w0.254: v1(7.7,-42.5) 7.7,-39.9 8.8,-38.8 29.8,-38.8 43.7,-24.9 43.7,-21.7 v1(44.5,-20.9) v1@44.3,-20.9
RESET: P6.1 R10.1 SPI.5 | length 20.8
  Top Layer w0.254: P6.1@15.49,-31.25 R10.1
  Top Layer w0.35: P6.1 P6.1@15.49,-31.25 ; R10.1 20.15,-31.25 24.82,-35.92 SPI.5
SCK: I2C.4 P6.19 R11.1 SPI.3 | length 26.2
  Top Layer w0.254: R11.1 10.477,-44.873 12.925,-44.873 14.239,-46.187 15.595,-46.187 16.622,-45.16 I2C.4 P6.19@14.045,-41.495
  Top Layer w0.35: P6.19@14.045,-41.495 P6.19
  Bottom Layer w0.254: I2C.4 21.94,-45.16 23.8,-43.3 25.46,-43.3 SPI.3
VCC: C5.2 I2C.1 On.A P6.20 R1.2 R2.1 R3.2 R4.1 R10.2 R11.2 R12.2 SPI.2 | length 173.7
  Top Layer w0.254: v1(2.8,-29.4) 2.8,-29.25 R2.1 ; On.A 3.9,-48.3 1.6,-48.3 1,-47.7 v1(1,-30.8) 1,-8.4 R1.2@6.05,-3.35 ; I2C.1@14,-47.7 15.5,-49.2 18.3,-49.2 20.1,-47.4 20.1,-45.36 P6.20
  Top Layer w0.35: On.A 7.45,-47.2 R12.2 R11.2 13.45,-47.25 I2C.1 I2C.1@14,-47.7 ; R1.2@6.05,-3.35 R1.2 ; P6.20 15.315,-38.085 17.75,-35.65 C5.2 R10.2 ; R4.1 41.5,-1.5 42.1,-0.9 47.5,-0.9 48.3,-1.7 48.3,-23.5 47.75,-24.05 R3.2 45.6,-24.15 v1(45.6,-29.1)
  Bottom Layer w0.254: v1(1,-30.8) 1.4,-30.8 v1(2.8,-29.4) ; I2C.1@14.4,-47.7 15.5,-48.8 29.4,-48.8 SPI.2@29.9,-48.3 ; SPI.2 29.9,-47.092 30.927,-46.065 30.927,-44.973 45.6,-30.3 v1(45.6,-29.1)
  Bottom Layer w0.35: I2C.1 I2C.1@14.4,-47.7 ; SPI.2@29.9,-48.3 SPI.2
pads on no net: I2C.5 Mot1.1 Mot1.9 Mot1.14 Mot1.23 Mot1.28 Mot1.36 Mot2.1 Mot2.9 Mot2.14 Mot2.23 Mot2.28 Mot2.36 S1.1 S2.1 S3.1

## Polygon pours and split planes (outlines as drawn)
GND on Top Layer "Top Layer-No Net" (solid, pour order 6): 0.5,-0.5 49.5,-0.5 49.5,-49.5 0.6,-49.5 0.5,-49.4
GND on Bottom Layer "Top Layer-No Net" (solid, pour order 12): 0.5,-0.5 49.5,-0.5 49.5,-49.5 0.5,-49.5 0.5,-49.4 0.5,-49.5
no net on Internal Plane 1 (split plane): 49.49,-49.49 0.51,-49.49 0.51,-0.51 49.49,-0.51
no net on Internal Plane 2 (split plane): 49.49,-49.49 0.51,-49.49 0.51,-0.51 49.49,-0.51

## Silkscreen, mask and mechanical layers (free items; w line width, h text height)
Bottom Overlay:
  text "M. Pagnamenta 06.2013" at 48.9,-0.7 h1.52 r90
  text "H-Bridge" at 2.8,-4.2 h1.52 r90
  text "Ver. 0.1a" at 2.4,-31.7 h1.52 r90
Mechanical 1:
  the board outline again, w0.254
Drill Drawing:
  text ".LEGEND" at 55.08,-44.92 h1.52
  text "Drill Drawing." at 55.08,-47.46 h1.52

## Text inside footprints (layer, text, board x,y; h text height)
SPI: Top Overlay "6" at 23.296,-47.232 h1.27 r180; Top Overlay "5" at 23.296,-44.692 h1.27 r180; Top Overlay "2" at 32.44,-47.232 h1.27 r180; Top Overlay "1" at 31.932,-44.692 h1.27 r180